# EAGLE board ai_firefly_panel (EAGLE 6.5.0)
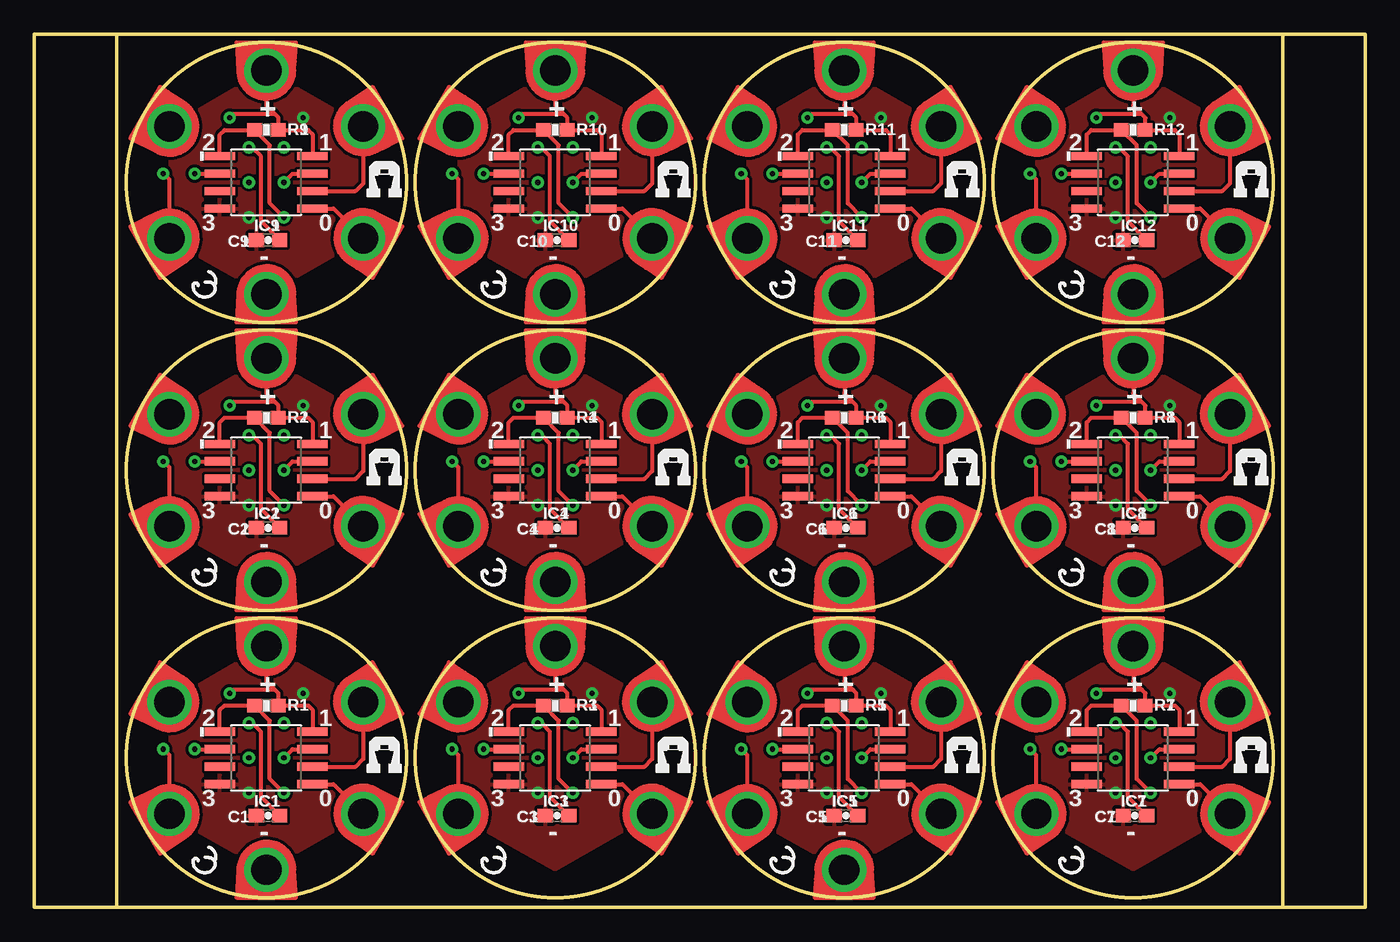
[diagram p0: board, top side]
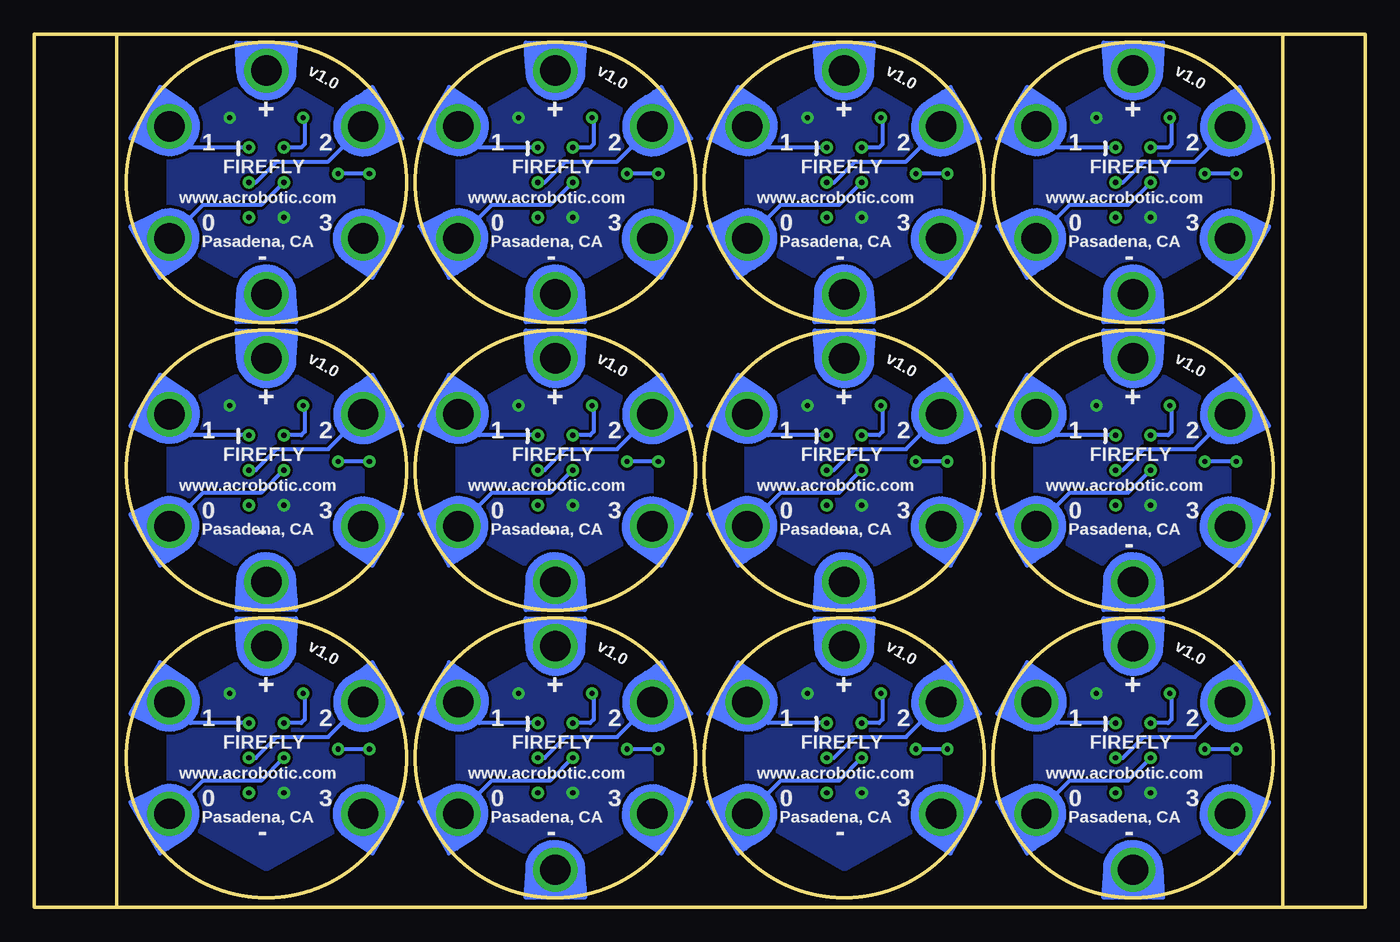
[diagram p1: board, bottom side, seen from below]

Size 96.72 x 63.46 mm. Coordinates in mm from the lower left corner, seen from the top.
Outline: 6,63.46 0,63.46 0,0 6,0
Outline: 6,63.46 90.72,63.46
Outline: 90.72,63.46 96.72,63.46 96.72,0 90.72,0
Outline: 90.72,63.46 90.72,0
Outline: 90.72,0 6,0
Outline: 6,63.46 6,0
Outline: circle at 16.86,10.86 radius 10.16
Outline: circle at 16.86,31.78 radius 10.16
Outline: circle at 37.86,10.86 radius 10.16
Outline: circle at 37.86,31.78 radius 10.16
Outline: circle at 58.86,10.86 radius 10.16
Outline: circle at 58.86,31.78 radius 10.16
Outline: circle at 79.86,10.86 radius 10.16
Outline: circle at 79.86,31.78 radius 10.16
Outline: circle at 16.86,52.7 radius 10.16
Outline: circle at 37.86,52.7 radius 10.16
Outline: circle at 58.86,52.7 radius 10.16
Outline: circle at 79.86,52.7 radius 10.16
Copper layers (1*16): Top 0.035mm / dielectric 1.5mm / Bottom 0.035mm
Design rules "ai_2layer_qfn": minimum track width 7mil, minimum drill 15mil, track to track 8mil, track to pad 8mil, pad to pad 8mil, via to via 8mil, smd to smd 8mil, copper to edge 8mil, drill to drill 8mil, minimum pad ring 1mil, minimum via ring 10mil, stop-mask expansion 4mil, vias tented up to drill 20mil, thermal gap 10mil
Net classes: 0 default: width 0.254 mm; 1 PWR: width 0.305 mm

## Footprints (pad centres in the part's own frame; a part is rotated, then mirrored left to right if it is on the bottom)
1X01-PETAL = drill 2.2: 1 0,0
CAP-0603 = smd 1.1 x 1: 1 -0.85,0; 2 0.85,0
S008-EIAJ = smd 0.61 x 2.21: 1 -1.905,-3.378; 2 -0.635,-3.378; 3 0.635,-3.378; 4 1.905,-3.378; 5 1.905,3.353; 6 0.635,3.353; 7 -0.635,3.353; 8 -1.905,3.353
RES-0603 = smd 1.1 x 1: 1 -0.85,0; 2 0.85,0

## Placement (x,y rotation side)
0  1X01-PETAL  [1X01-PETAL]  23.9,6.8 240 top
1  1X01-PETAL  [1X01-PETAL]  23.9,14.92 300 top
2  1X01-PETAL  [1X01-PETAL]  9.82,14.92 60 top
3  1X01-PETAL  [1X01-PETAL]  9.82,6.8 120 top
4  1X01-PETAL  [1X01-PETAL]  23.9,35.84 300 top
5  1X01-PETAL  [1X01-PETAL]  23.9,27.72 240 top
6  1X01-PETAL  [1X01-PETAL]  9.82,27.72 120 top
7  1X01-PETAL  [1X01-PETAL]  9.82,35.84 60 top
8  1X01-PETAL  [1X01-PETAL]  44.9,14.92 300 top
9  1X01-PETAL  [1X01-PETAL]  44.9,6.8 240 top
10  1X01-PETAL  [1X01-PETAL]  30.82,6.8 120 top
11  1X01-PETAL  [1X01-PETAL]  30.82,14.92 60 top
12  1X01-PETAL  [1X01-PETAL]  44.9,35.84 300 top
13  1X01-PETAL  [1X01-PETAL]  44.9,27.72 240 top
14  1X01-PETAL  [1X01-PETAL]  30.82,27.72 120 top
15  1X01-PETAL  [1X01-PETAL]  30.82,35.84 60 top
16  1X01-PETAL  [1X01-PETAL]  65.9,14.92 300 top
17  1X01-PETAL  [1X01-PETAL]  65.9,6.8 240 top
18  1X01-PETAL  [1X01-PETAL]  51.82,6.8 120 top
19  1X01-PETAL  [1X01-PETAL]  51.82,14.92 60 top
20  1X01-PETAL  [1X01-PETAL]  65.9,35.84 300 top
21  1X01-PETAL  [1X01-PETAL]  65.9,27.72 240 top
22  1X01-PETAL  [1X01-PETAL]  51.82,27.72 120 top
23  1X01-PETAL  [1X01-PETAL]  51.82,35.84 60 top
24  1X01-PETAL  [1X01-PETAL]  86.9,14.92 300 top
25  1X01-PETAL  [1X01-PETAL]  86.9,6.8 240 top
26  1X01-PETAL  [1X01-PETAL]  72.82,6.8 120 top
27  1X01-PETAL  [1X01-PETAL]  72.82,14.92 60 top
28  1X01-PETAL  [1X01-PETAL]  86.9,35.84 300 top
29  1X01-PETAL  [1X01-PETAL]  86.9,27.72 240 top
30  1X01-PETAL  [1X01-PETAL]  72.82,27.72 120 top
31  1X01-PETAL  [1X01-PETAL]  72.82,35.84 60 top
32  1X01-PETAL  [1X01-PETAL]  23.9,56.76 300 top
33  1X01-PETAL  [1X01-PETAL]  23.9,48.64 240 top
34  1X01-PETAL  [1X01-PETAL]  9.82,48.64 120 top
35  1X01-PETAL  [1X01-PETAL]  9.82,56.76 60 top
36  1X01-PETAL  [1X01-PETAL]  44.9,56.76 300 top
37  1X01-PETAL  [1X01-PETAL]  44.9,48.64 240 top
38  1X01-PETAL  [1X01-PETAL]  30.82,48.64 120 top
39  1X01-PETAL  [1X01-PETAL]  30.82,56.76 60 top
40  1X01-PETAL  [1X01-PETAL]  65.9,56.76 300 top
41  1X01-PETAL  [1X01-PETAL]  65.9,48.64 240 top
42  1X01-PETAL  [1X01-PETAL]  51.82,48.64 120 top
43  1X01-PETAL  [1X01-PETAL]  51.82,56.76 60 top
44  1X01-PETAL  [1X01-PETAL]  86.9,56.76 300 top
45  1X01-PETAL  [1X01-PETAL]  86.9,48.64 240 top
46  1X01-PETAL  [1X01-PETAL]  72.82,48.64 120 top
47  1X01-PETAL  [1X01-PETAL]  72.82,56.76 60 top
+  1X01-PETAL  [1X01-PETAL]  16.86,18.99 0 top
+1  1X01-PETAL  [1X01-PETAL]  16.86,39.91 0 top
+2  1X01-PETAL  [1X01-PETAL]  37.86,18.99 0 top
+3  1X01-PETAL  [1X01-PETAL]  37.86,39.91 0 top
+4  1X01-PETAL  [1X01-PETAL]  58.86,18.99 0 top
+5  1X01-PETAL  [1X01-PETAL]  58.86,39.91 0 top
+6  1X01-PETAL  [1X01-PETAL]  79.86,18.99 0 top
+7  1X01-PETAL  [1X01-PETAL]  79.86,39.91 0 top
+8  1X01-PETAL  [1X01-PETAL]  16.86,60.83 0 top
+9  1X01-PETAL  [1X01-PETAL]  37.86,60.83 0 top
+10  1X01-PETAL  [1X01-PETAL]  58.86,60.83 0 top
+11  1X01-PETAL  [1X01-PETAL]  79.86,60.83 0 top
-  1X01-PETAL  [1X01-PETAL]  16.86,2.73 180 top
-1  1X01-PETAL  [1X01-PETAL]  16.86,23.65 180 top
-2  1X01-PETAL  [1X01-PETAL]  37.86,23.65 180 top
-3  1X01-PETAL  [1X01-PETAL]  58.86,2.73 180 top
-4  1X01-PETAL  [1X01-PETAL]  58.86,23.65 180 top
-5  1X01-PETAL  [1X01-PETAL]  79.86,23.65 180 top
-6  1X01-PETAL  [1X01-PETAL]  16.86,44.57 180 top
-7  1X01-PETAL  [1X01-PETAL]  37.86,44.57 180 top
-8  1X01-PETAL  [1X01-PETAL]  58.86,44.57 180 top
-9  1X01-PETAL  [1X01-PETAL]  79.86,44.57 180 top
C1  0.1uF  [CAP-0603]  16.99,6.67 180 top
C2  0.1uF  [CAP-0603]  16.99,27.59 180 top
C3  0.1uF  [CAP-0603]  37.99,6.67 180 top
C4  0.1uF  [CAP-0603]  37.99,27.59 180 top
C5  0.1uF  [CAP-0603]  58.99,6.67 180 top
C6  0.1uF  [CAP-0603]  58.99,27.59 180 top
C7  0.1uF  [CAP-0603]  79.99,6.67 180 top
C8  0.1uF  [CAP-0603]  79.99,27.59 180 top
C9  0.1uF  [CAP-0603]  16.99,48.51 180 top
C10  0.1uF  [CAP-0603]  37.99,48.51 180 top
C11  0.1uF  [CAP-0603]  58.99,48.51 180 top
C12  0.1uF  [CAP-0603]  79.99,48.51 180 top
IC1  ATTINY45TINY85-SMT  [S008-EIAJ]  16.86,10.86 270 top
IC2  ATTINY45TINY85-SMT  [S008-EIAJ]  16.86,31.78 270 top
IC3  ATTINY45TINY85-SMT  [S008-EIAJ]  37.86,10.86 270 top
IC4  ATTINY45TINY85-SMT  [S008-EIAJ]  37.86,31.78 270 top
IC5  ATTINY45TINY85-SMT  [S008-EIAJ]  58.86,10.86 270 top
IC6  ATTINY45TINY85-SMT  [S008-EIAJ]  58.86,31.78 270 top
IC7  ATTINY45TINY85-SMT  [S008-EIAJ]  79.86,10.86 270 top
IC8  ATTINY45TINY85-SMT  [S008-EIAJ]  79.86,31.78 270 top
IC9  ATTINY45TINY85-SMT  [S008-EIAJ]  16.86,52.7 270 top
IC10  ATTINY45TINY85-SMT  [S008-EIAJ]  37.86,52.7 270 top
IC11  ATTINY45TINY85-SMT  [S008-EIAJ]  58.86,52.7 270 top
IC12  ATTINY45TINY85-SMT  [S008-EIAJ]  79.86,52.7 270 top
R1  10K  [RES-0603]  16.86,14.67 0 top
R2  10K  [RES-0603]  16.86,35.59 0 top
R3  10K  [RES-0603]  37.86,14.67 0 top
R4  10K  [RES-0603]  37.86,35.59 0 top
R5  10K  [RES-0603]  58.86,14.67 0 top
R6  10K  [RES-0603]  58.86,35.59 0 top
R7  10K  [RES-0603]  79.86,14.67 0 top
R8  10K  [RES-0603]  79.86,35.59 0 top
R9  10K  [RES-0603]  16.86,56.51 0 top
R10  10K  [RES-0603]  37.86,56.51 0 top
R11  10K  [RES-0603]  58.86,56.51 0 top
R12  10K  [RES-0603]  79.86,56.51 0 top
U$1  AI-LOGOXS  [AI-LOGO-XS]  24.1,30.64 0 top
U$2  AI-LOGOXS  [AI-LOGO-XS]  45.1,9.72 0 top
U$3  AI-LOGOXS  [AI-LOGO-XS]  45.1,30.64 0 top
U$4  AI-LOGOXS  [AI-LOGO-XS]  66.1,9.72 0 top
U$5  AI-LOGOXS  [AI-LOGO-XS]  66.1,30.64 0 top
U$6  AI-LOGOXS  [AI-LOGO-XS]  87.1,9.72 0 top
U$7  AI-LOGOXS  [AI-LOGO-XS]  87.1,30.64 0 top
U$8  AI-LOGOXS  [AI-LOGO-XS]  24.1,51.56 0 top
U$9  AI-LOGOXS  [AI-LOGO-XS]  24.1,9.72 0 top
U$10  AI-LOGOXS  [AI-LOGO-XS]  45.1,51.56 0 top
U$11  AI-LOGOXS  [AI-LOGO-XS]  66.1,51.56 0 top
U$12  AI-LOGOXS  [AI-LOGO-XS]  87.1,51.56 0 top

## Library data of the parts
0 1-47 + +1-+11 - -1--9 = Ai_Connectors
C1-C12 R1-R12 = Ai_Passives
IC1-IC12 = Ai_IC
U$1-U$12 = Ai_Miscellany

## Nets
0: 0.1 IC1.5
1: 1.1 IC1.6
2: 2.1 IC1.7
3: 3.1 IC1.2
4: 6.1 IC2.2
5: 7.1 IC2.7
6: 4.1 IC2.6
7: 5.1 IC2.5
8: 10.1 IC3.2
9: 11.1 IC3.7
10: 8.1 IC3.6
11: 9.1 IC3.5
12: 14.1 IC4.2
13: 15.1 IC4.7
14: 12.1 IC4.6
15: 13.1 IC4.5
16: 18.1 IC5.2
17: 19.1 IC5.7
18: 16.1 IC5.6
19: 17.1 IC5.5
20: 22.1 IC6.2
21: 23.1 IC6.7
22: 20.1 IC6.6
23: 21.1 IC6.5
24: 26.1 IC7.2
25: 27.1 IC7.7
26: 24.1 IC7.6
27: 25.1 IC7.5
28: 30.1 IC8.2
29: 31.1 IC8.7
30: 28.1 IC8.6
31: 29.1 IC8.5
32: 34.1 IC9.2
33: 35.1 IC9.7
34: 32.1 IC9.6
35: 33.1 IC9.5
36: 38.1 IC10.2
37: 39.1 IC10.7
38: 36.1 IC10.6
39: 37.1 IC10.5
40: 42.1 IC11.2
41: 43.1 IC11.7
42: 40.1 IC11.6
43: 41.1 IC11.5
44: 46.1 IC12.2
45: 47.1 IC12.7
46: 44.1 IC12.6
47: 45.1 IC12.5
GND: -.1 C1.2 IC1.4
GND1: -1.1 C2.2 IC2.4
GND2: C3.2 IC3.4
GND3: -2.1 C4.2 IC4.4
GND4: -3.1 C5.2 IC5.4
GND5: -4.1 C6.2 IC6.4
GND6: C7.2 IC7.4
GND7: -5.1 C8.2 IC8.4
GND8: -6.1 C9.2 IC9.4
GND9: -7.1 C10.2 IC10.4
GND10: -8.1 C11.2 IC11.4
GND11: -9.1 C12.2 IC12.4
RES: IC1.1 R1.1
RES1: IC2.1 R2.1
RES2: IC3.1 R3.1
RES3: IC4.1 R4.1
RES4: IC5.1 R5.1
RES5: IC6.1 R6.1
RES6: IC7.1 R7.1
RES7: IC8.1 R8.1
RES8: IC9.1 R9.1
RES9: IC10.1 R10.1
RES10: IC11.1 R11.1
RES11: IC12.1 R12.1
VCC: +.1 C1.1 IC1.8 R1.2
VCC1: +1.1 C2.1 IC2.8 R2.2
VCC2: +2.1 C3.1 IC3.8 R3.2
VCC3: +3.1 C4.1 IC4.8 R4.2
VCC4: +4.1 C5.1 IC5.8 R5.2
VCC5: +5.1 C6.1 IC6.8 R6.2
VCC6: +6.1 C7.1 IC7.8 R7.2
VCC7: +7.1 C8.1 IC8.8 R8.2
VCC8: +8.1 C9.1 IC9.8 R9.2
VCC9: +9.1 C10.1 IC10.8 R10.2
VCC10: +10.1 C11.1 IC11.8 R11.2
VCC11: +11.1 C12.1 IC12.8 R12.2

## Tracks (layer width: path | path; a pad name or v marks a point on that pad's centre or on a via)
0  (via drill 0.38)
  Top 0.305: IC1.5 21.74,8.96 0.1
  Bottom 0.305: v15.59,10.86 17.24,9.21 21.49,9.21 0.1
1  (via drill 0.38)
  Top 0.305: IC1.6 23.34,10.22 23.9,10.79 1.1
  Bottom 0.305: v18.13,13.4 22.38,13.4 1.1
2  (via drill 0.38)
  Top 0.305: v18.13,10.86 18.77,11.49 IC1.7
  Bottom 0.305: 2.1 12.36,12.38 16.1,12.38 17.62,10.86 v18.13,10.86
3  (via drill 0.38)
  Top 0.305: 3.1 9.82,11.06 v9.37,11.49 | v11.65,11.49 IC1.2
  Bottom 0.305: v9.37,11.49 v11.65,11.49
4  (via drill 0.38)
  Top 0.305: 6.1 9.82,31.98 v9.37,32.41 | v11.65,32.41 IC2.2
  Bottom 0.305: v9.37,32.41 v11.65,32.41
5  (via drill 0.38)
  Top 0.305: v18.13,31.78 18.77,32.41 IC2.7
  Bottom 0.305: 7.1 12.36,33.3 16.1,33.3 17.62,31.78 v18.13,31.78
6  (via drill 0.38)
  Top 0.305: IC2.6 23.34,31.14 23.9,31.71 4.1
  Bottom 0.305: v18.13,34.32 22.38,34.32 4.1
7  (via drill 0.38)
  Top 0.305: IC2.5 21.74,29.88 5.1
  Bottom 0.305: v15.59,31.78 17.24,30.13 21.49,30.13 5.1
8  (via drill 0.38)
  Top 0.305: 10.1 30.82,11.06 v30.37,11.49 | v32.65,11.49 IC3.2
  Bottom 0.305: v30.37,11.49 v32.65,11.49
9  (via drill 0.38)
  Top 0.305: v39.13,10.86 39.77,11.49 IC3.7
  Bottom 0.305: 11.1 33.36,12.38 37.1,12.38 38.62,10.86 v39.13,10.86
10  (via drill 0.38)
  Top 0.305: IC3.6 44.34,10.22 44.9,10.79 8.1
  Bottom 0.305: v39.13,13.4 43.38,13.4 8.1
11  (via drill 0.38)
  Top 0.305: IC3.5 42.74,8.96 9.1
  Bottom 0.305: v36.59,10.86 38.24,9.21 42.49,9.21 9.1
12  (via drill 0.38)
  Top 0.305: 14.1 30.82,31.98 v30.37,32.41 | v32.65,32.41 IC4.2
  Bottom 0.305: v30.37,32.41 v32.65,32.41
13  (via drill 0.38)
  Top 0.305: v39.13,31.78 39.77,32.41 IC4.7
  Bottom 0.305: 15.1 33.36,33.3 37.1,33.3 38.62,31.78 v39.13,31.78
14  (via drill 0.38)
  Top 0.305: IC4.6 44.34,31.14 44.9,31.71 12.1
  Bottom 0.305: v39.13,34.32 43.38,34.32 12.1
15  (via drill 0.38)
  Top 0.305: IC4.5 42.74,29.88 13.1
  Bottom 0.305: v36.59,31.78 38.24,30.13 42.49,30.13 13.1
16  (via drill 0.38)
  Top 0.305: 18.1 51.82,11.06 v51.37,11.49 | v53.65,11.49 IC5.2
  Bottom 0.305: v51.37,11.49 v53.65,11.49
17  (via drill 0.38)
  Top 0.305: v60.13,10.86 60.77,11.49 IC5.7
  Bottom 0.305: 19.1 54.36,12.38 58.1,12.38 59.62,10.86 v60.13,10.86
18  (via drill 0.38)
  Top 0.305: IC5.6 65.34,10.22 65.9,10.79 16.1
  Bottom 0.305: v60.13,13.4 64.38,13.4 16.1
19  (via drill 0.38)
  Top 0.305: IC5.5 63.74,8.96 17.1
  Bottom 0.305: v57.59,10.86 59.24,9.21 63.49,9.21 17.1
20  (via drill 0.38)
  Top 0.305: 22.1 51.82,31.98 v51.37,32.41 | v53.65,32.41 IC6.2
  Bottom 0.305: v51.37,32.41 v53.65,32.41
21  (via drill 0.38)
  Top 0.305: v60.13,31.78 60.77,32.41 IC6.7
  Bottom 0.305: 23.1 54.36,33.3 58.1,33.3 59.62,31.78 v60.13,31.78
22  (via drill 0.38)
  Top 0.305: IC6.6 65.34,31.14 65.9,31.71 20.1
  Bottom 0.305: v60.13,34.32 64.38,34.32 20.1
23  (via drill 0.38)
  Top 0.305: IC6.5 63.74,29.88 21.1
  Bottom 0.305: v57.59,31.78 59.24,30.13 63.49,30.13 21.1
24  (via drill 0.38)
  Top 0.305: 26.1 72.82,11.06 v72.37,11.49 | v74.65,11.49 IC7.2
  Bottom 0.305: v72.37,11.49 v74.65,11.49
25  (via drill 0.38)
  Top 0.305: v81.13,10.86 81.77,11.49 IC7.7
  Bottom 0.305: 27.1 75.36,12.38 79.1,12.38 80.62,10.86 v81.13,10.86
26  (via drill 0.38)
  Top 0.305: IC7.6 86.34,10.22 86.9,10.79 24.1
  Bottom 0.305: v81.13,13.4 85.38,13.4 24.1
27  (via drill 0.38)
  Top 0.305: IC7.5 84.74,8.96 25.1
  Bottom 0.305: v78.59,10.86 80.24,9.21 84.49,9.21 25.1
28  (via drill 0.38)
  Top 0.305: 30.1 72.82,31.98 v72.37,32.41 | v74.65,32.41 IC8.2
  Bottom 0.305: v72.37,32.41 v74.65,32.41
29  (via drill 0.38)
  Top 0.305: v81.13,31.78 81.77,32.41 IC8.7
  Bottom 0.305: 31.1 75.36,33.3 79.1,33.3 80.62,31.78 v81.13,31.78
30  (via drill 0.38)
  Top 0.305: IC8.6 86.34,31.14 86.9,31.71 28.1
  Bottom 0.305: v81.13,34.32 85.38,34.32 28.1
31  (via drill 0.38)
  Top 0.305: IC8.5 84.74,29.88 29.1
  Bottom 0.305: v78.59,31.78 80.24,30.13 84.49,30.13 29.1
32  (via drill 0.38)
  Top 0.305: 34.1 9.82,52.9 v9.37,53.34 | v11.65,53.34 IC9.2
  Bottom 0.305: v9.37,53.34 v11.65,53.34
33  (via drill 0.38)
  Top 0.305: v18.13,52.7 18.77,53.34 IC9.7
  Bottom 0.305: 35.1 12.36,54.22 16.1,54.22 17.62,52.7 v18.13,52.7
34  (via drill 0.38)
  Top 0.305: IC9.6 23.34,52.06 23.9,52.63 32.1
  Bottom 0.305: v18.13,55.24 22.38,55.24 32.1
35  (via drill 0.38)
  Top 0.305: IC9.5 21.74,50.8 33.1
  Bottom 0.305: v15.59,52.7 17.24,51.05 21.49,51.05 33.1
36  (via drill 0.38)
  Top 0.305: 38.1 30.82,52.9 v30.37,53.34 | v32.65,53.34 IC10.2
  Bottom 0.305: v30.37,53.34 v32.65,53.34
37  (via drill 0.38)
  Top 0.305: v39.13,52.7 39.77,53.34 IC10.7
  Bottom 0.305: 39.1 33.36,54.22 37.1,54.22 38.62,52.7 v39.13,52.7
38  (via drill 0.38)
  Top 0.305: IC10.6 44.34,52.06 44.9,52.63 36.1
  Bottom 0.305: v39.13,55.24 43.38,55.24 36.1
39  (via drill 0.38)
  Top 0.305: IC10.5 42.74,50.8 37.1
  Bottom 0.305: v36.59,52.7 38.24,51.05 42.49,51.05 37.1
40  (via drill 0.38)
  Top 0.305: 42.1 51.82,52.9 v51.37,53.34 | v53.65,53.34 IC11.2
  Bottom 0.305: v51.37,53.34 v53.65,53.34
41  (via drill 0.38)
  Top 0.305: v60.13,52.7 60.77,53.34 IC11.7
  Bottom 0.305: 43.1 54.36,54.22 58.1,54.22 59.62,52.7 v60.13,52.7
42  (via drill 0.38)
  Top 0.305: IC11.6 65.34,52.06 65.9,52.63 40.1
  Bottom 0.305: v60.13,55.24 64.38,55.24 40.1
43  (via drill 0.38)
  Top 0.305: IC11.5 63.74,50.8 41.1
  Bottom 0.305: v57.59,52.7 59.24,51.05 63.49,51.05 41.1
44  (via drill 0.38)
  Top 0.305: 46.1 72.82,52.9 v72.37,53.34 | v74.65,53.34 IC12.2
  Bottom 0.305: v72.37,53.34 v74.65,53.34
45  (via drill 0.38)
  Top 0.305: v81.13,52.7 81.77,53.34 IC12.7
  Bottom 0.305: 47.1 75.36,54.22 79.1,54.22 80.62,52.7 v81.13,52.7
46  (via drill 0.38)
  Top 0.305: IC12.6 86.34,52.06 86.9,52.63 44.1
  Bottom 0.305: v81.13,55.24 85.38,55.24 44.1
47  (via drill 0.38)
  Top 0.305: IC12.5 84.74,50.8 45.1
  Bottom 0.305: v78.59,52.7 80.24,51.05 84.49,51.05 45.1
GND  (via drill 0.38)
  other vias: 15.59,8.32 19.53,15.56
  pour Top: 9.88,14.92 9.88,6.67 16.86,2.73 23.97,6.8 23.97,14.92 16.86,18.99
  pour Bottom: 9.88,14.92 9.88,6.67 16.86,2.73 23.97,6.8 23.97,14.92 16.86,18.99
GND1  (via drill 0.38)
  other vias: 15.59,29.24 19.53,36.48
  pour Top: 9.88,35.84 9.88,27.59 16.86,23.65 23.97,27.72 23.97,35.84 16.86,39.91
  pour Bottom: 9.88,35.84 9.88,27.59 16.86,23.65 23.97,27.72 23.97,35.84 16.86,39.91
GND2  (via drill 0.38)
  other vias: 36.59,8.32 40.53,15.56
  pour Top: 30.88,14.92 30.88,6.67 37.86,2.73 44.97,6.8 44.97,14.92 37.86,18.99
  pour Bottom: 30.88,14.92 30.88,6.67 37.86,2.73 44.97,6.8 44.97,14.92 37.86,18.99
GND3  (via drill 0.38)
  other vias: 36.59,29.24 40.53,36.48
  pour Top: 30.88,35.84 30.88,27.59 37.86,23.65 44.97,27.72 44.97,35.84 37.86,39.91
  pour Bottom: 30.88,35.84 30.88,27.59 37.86,23.65 44.97,27.72 44.97,35.84 37.86,39.91
GND4  (via drill 0.38)
  other vias: 57.59,8.32 61.53,15.56
  pour Top: 51.88,14.92 51.88,6.67 58.86,2.73 65.97,6.8 65.97,14.92 58.86,18.99
  pour Bottom: 51.88,14.92 51.88,6.67 58.86,2.73 65.97,6.8 65.97,14.92 58.86,18.99
GND5  (via drill 0.38)
  other vias: 57.59,29.24 61.53,36.48
  pour Top: 51.88,35.84 51.88,27.59 58.86,23.65 65.97,27.72 65.97,35.84 58.86,39.91
  pour Bottom: 51.88,35.84 51.88,27.59 58.86,23.65 65.97,27.72 65.97,35.84 58.86,39.91
GND6  (via drill 0.38)
  other vias: 78.59,8.32 82.53,15.56
  pour Top: 72.88,14.92 72.88,6.67 79.86,2.73 86.97,6.8 86.97,14.92 79.86,18.99
  pour Bottom: 72.88,14.92 72.88,6.67 79.86,2.73 86.97,6.8 86.97,14.92 79.86,18.99
GND7  (via drill 0.38)
  other vias: 78.59,29.24 82.53,36.48
  pour Top: 72.88,35.84 72.88,27.59 79.86,23.65 86.97,27.72 86.97,35.84 79.86,39.91
  pour Bottom: 72.88,35.84 72.88,27.59 79.86,23.65 86.97,27.72 86.97,35.84 79.86,39.91
GND8  (via drill 0.38)
  other vias: 15.59,50.16 19.53,57.4
  pour Top: 9.88,56.76 9.88,48.51 16.86,44.57 23.97,48.64 23.97,56.76 16.86,60.83
  pour Bottom: 9.88,56.76 9.88,48.51 16.86,44.57 23.97,48.64 23.97,56.76 16.86,60.83
GND9  (via drill 0.38)
  other vias: 36.59,50.16 40.53,57.4
  pour Top: 30.88,56.76 30.88,48.51 37.86,44.57 44.97,48.64 44.97,56.76 37.86,60.83
  pour Bottom: 30.88,56.76 30.88,48.51 37.86,44.57 44.97,48.64 44.97,56.76 37.86,60.83
GND10  (via drill 0.38)
  other vias: 57.59,50.16 61.53,57.4
  pour Top: 51.88,56.76 51.88,48.51 58.86,44.57 65.97,48.64 65.97,56.76 58.86,60.83
  pour Bottom: 51.88,56.76 51.88,48.51 58.86,44.57 65.97,48.64 65.97,56.76 58.86,60.83
GND11  (via drill 0.38)
  other vias: 78.59,50.16 82.53,57.4
  pour Top: 72.88,56.76 72.88,48.51 79.86,44.57 86.97,48.64 86.97,56.76 79.86,60.83
  pour Bottom: 72.88,56.76 72.88,48.51 79.86,44.57 86.97,48.64 86.97,56.76 79.86,60.83
RES  (via drill 0.38)
  Top 0.305: IC1.1 13.48,14.34 13.81,14.67 R1.1 17.11,13.57 17.11,9.34 v18.13,8.32
RES1  (via drill 0.38)
  Top 0.305: IC2.1 13.48,35.26 13.81,35.59 R2.1 17.11,34.49 17.11,30.26 v18.13,29.24
RES2  (via drill 0.38)
  Top 0.305: IC3.1 34.48,14.34 34.81,14.67 R3.1 38.11,13.57 38.11,9.34 v39.13,8.32
RES3  (via drill 0.38)
  Top 0.305: IC4.1 34.48,35.26 34.81,35.59 R4.1 38.11,34.49 38.11,30.26 v39.13,29.24
RES4  (via drill 0.38)
  Top 0.305: IC5.1 55.48,14.34 55.81,14.67 R5.1 59.11,13.57 59.11,9.34 v60.13,8.32
RES5  (via drill 0.38)
  Top 0.305: IC6.1 55.48,35.26 55.81,35.59 R6.1 59.11,34.49 59.11,30.26 v60.13,29.24
RES6  (via drill 0.38)
  Top 0.305: IC7.1 76.48,14.34 76.81,14.67 R7.1 80.11,13.57 80.11,9.34 v81.13,8.32
RES7  (via drill 0.38)
  Top 0.305: IC8.1 76.48,35.26 76.81,35.59 R8.1 80.11,34.49 80.11,30.26 v81.13,29.24
RES8  (via drill 0.38)
  Top 0.305: IC9.1 13.48,56.18 13.81,56.51 R9.1 17.11,55.41 17.11,51.18 v18.13,50.16
RES9  (via drill 0.38)
  Top 0.305: IC10.1 34.48,56.18 34.81,56.51 R10.1 38.11,55.41 38.11,51.18 v39.13,50.16
RES10  (via drill 0.38)
  Top 0.305: IC11.1 55.48,56.18 55.81,56.51 R11.1 59.11,55.41 59.11,51.18 v60.13,50.16
RES11  (via drill 0.38)
  Top 0.305: IC12.1 76.48,56.18 76.81,56.51 R12.1 80.11,55.41 80.11,51.18 v81.13,50.16
VCC  (via drill 0.38)
  Top 0.305: C1.1 16.48,8.03 16.48,12.77 15.84,13.4 v15.59,13.4 | IC1.8 20.21,14.37 19.91,14.67 R1.2 17.75,14.71 17.75,15.56 17.5,15.81 | 17.5,15.81 14.45,15.81 v14.19,15.56 | +.1 16.86,16.45 17.5,15.81
  Bottom 0.305: v15.59,13.4 14.32,13.4 14.07,13.65 14.07,15.56 v14.19,15.56
VCC1  (via drill 0.38)
  Top 0.305: C2.1 16.48,28.95 16.48,33.69 15.84,34.32 v15.59,34.32 | IC2.8 20.21,35.28 19.91,35.59 R2.2 17.75,35.63 17.75,36.48 17.5,36.73 | 17.5,36.73 14.45,36.73 v14.19,36.48 | +1.1 16.86,37.37 17.5,36.73
  Bottom 0.305: v15.59,34.32 14.32,34.32 14.07,34.57 14.07,36.48 v14.19,36.48
VCC2  (via drill 0.38)
  Top 0.305: C3.1 37.48,8.03 37.48,12.77 36.84,13.4 v36.59,13.4 | IC3.8 41.21,14.37 40.91,14.67 R3.2 38.75,14.71 38.75,15.56 38.49,15.81 | 38.49,15.81 35.45,15.81 v35.19,15.56 | +2.1 37.86,16.45 38.49,15.81
  Bottom 0.305: v36.59,13.4 35.32,13.4 35.07,13.65 35.07,15.56 v35.19,15.56
VCC3  (via drill 0.38)
  Top 0.305: C4.1 37.48,28.95 37.48,33.69 36.84,34.32 v36.59,34.32 | IC4.8 41.21,35.28 40.91,35.59 R4.2 38.75,35.63 38.75,36.48 38.49,36.73 | 38.49,36.73 35.45,36.73 v35.19,36.48 | +3.1 37.86,37.37 38.49,36.73
  Bottom 0.305: v36.59,34.32 35.32,34.32 35.07,34.57 35.07,36.48 v35.19,36.48
VCC4  (via drill 0.38)
  Top 0.305: C5.1 58.48,8.03 58.48,12.77 57.84,13.4 v57.59,13.4 | IC5.8 62.21,14.37 61.91,14.67 R5.2 59.75,14.71 59.75,15.56 59.49,15.81 | 59.49,15.81 56.45,15.81 v56.19,15.56 | +4.1 58.86,16.45 59.49,15.81
  Bottom 0.305: v57.59,13.4 56.32,13.4 56.07,13.65 56.07,15.56 v56.19,15.56
VCC5  (via drill 0.38)
  Top 0.305: C6.1 58.48,28.95 58.48,33.69 57.84,34.32 v57.59,34.32 | IC6.8 62.21,35.28 61.91,35.59 R6.2 59.75,35.63 59.75,36.48 59.49,36.73 | 59.49,36.73 56.45,36.73 v56.19,36.48 | +5.1 58.86,37.37 59.49,36.73
  Bottom 0.305: v57.59,34.32 56.32,34.32 56.07,34.57 56.07,36.48 v56.19,36.48
VCC6  (via drill 0.38)
  Top 0.305: C7.1 79.48,8.03 79.48,12.77 78.84,13.4 v78.59,13.4 | IC7.8 83.21,14.37 82.91,14.67 R7.2 80.75,14.71 80.75,15.56 80.5,15.81 | 80.5,15.81 77.45,15.81 v77.19,15.56 | +6.1 79.86,16.45 80.5,15.81
  Bottom 0.305: v78.59,13.4 77.32,13.4 77.07,13.65 77.07,15.56 v77.19,15.56
VCC7  (via drill 0.38)
  Top 0.305: C8.1 79.48,28.95 79.48,33.69 78.84,34.32 v78.59,34.32 | IC8.8 83.21,35.28 82.91,35.59 R8.2 80.75,35.63 80.75,36.48 80.5,36.73 | 80.5,36.73 77.45,36.73 v77.19,36.48 | +7.1 79.86,37.37 80.5,36.73
  Bottom 0.305: v78.59,34.32 77.32,34.32 77.07,34.57 77.07,36.48 v77.19,36.48
VCC8  (via drill 0.38)
  Top 0.305: C9.1 16.48,49.87 16.48,54.6 15.84,55.24 v15.59,55.24 | IC9.8 20.21,56.2 19.91,56.51 R9.2 17.75,56.55 17.75,57.4 17.5,57.65 | 17.5,57.65 14.45,57.65 v14.19,57.4 | +8.1 16.86,58.29 17.5,57.65
  Bottom 0.305: v15.59,55.24 14.32,55.24 14.07,55.49 14.07,57.4 v14.19,57.4
VCC9  (via drill 0.38)
  Top 0.305: C10.1 37.48,49.87 37.48,54.6 36.84,55.24 v36.59,55.24 | IC10.8 41.21,56.2 40.91,56.51 R10.2 38.75,56.55 38.75,57.4 38.49,57.65 | 38.49,57.65 35.45,57.65 v35.19,57.4 | +9.1 37.86,58.29 38.49,57.65
  Bottom 0.305: v36.59,55.24 35.32,55.24 35.07,55.49 35.07,57.4 v35.19,57.4
VCC10  (via drill 0.38)
  Top 0.305: C11.1 58.48,49.87 58.48,54.6 57.84,55.24 v57.59,55.24 | IC11.8 62.21,56.2 61.91,56.51 R11.2 59.75,56.55 59.75,57.4 59.49,57.65 | 59.49,57.65 56.45,57.65 v56.19,57.4 | +10.1 58.86,58.29 59.49,57.65
  Bottom 0.305: v57.59,55.24 56.32,55.24 56.07,55.49 56.07,57.4 v56.19,57.4
VCC11  (via drill 0.38)
  Top 0.305: C12.1 79.48,49.87 79.48,54.6 78.84,55.24 v78.59,55.24 | IC12.8 83.21,56.2 82.91,56.51 R12.2 80.75,56.55 80.75,57.4 80.5,57.65 | 80.5,57.65 77.45,57.65 v77.19,57.4 | +11.1 79.86,58.29 80.5,57.65
  Bottom 0.305: v78.59,55.24 77.32,55.24 77.07,55.49 77.07,57.4 v77.19,57.4

## Text on the board
tPlace: + | + | + | + | 2 | 1 | 2 | 1 | 2 | 1 | 2 | 1 | 3 | 0 | 3 | 0 | 3 | 0 | 3 | 0 | - | - | - | - | + | + | + | + | 2 | 1 | 2 | 1 | 2 | 1 | 2 | 1 | 3 | 0 | 3 | 0 | 3 | 0 | 3 | 0 | - | - | - | - | + | + | + | + | 2 | 1 | 2 | 1 | 2 | 1 | 2 | 1 | 3 | 0 | 3 | 0 | 3 | 0 | 3 | 0 | - | - | - | -
bPlace: v1.0 | v1.0 | v1.0 | v1.0 | + | + | + | + | 2 | 1 | 2 | 1 | 2 | 1 | 2 | 1 | FIREFLY | FIREFLY | FIREFLY | FIREFLY | www.acrobotic.com | www.acrobotic.com | www.acrobotic.com | www.acrobotic.com | 3 | 0 | 3 | 0 | 3 | 0 | 3 | 0 | Pasadena, CA | Pasadena, CA | Pasadena, CA | Pasadena, CA | - | - | - | - | v1.0 | v1.0 | v1.0 | v1.0 | + | + | + | + | 2 | 1 | 2 | 1 | 2 | 1 | 2 | 1 | FIREFLY | FIREFLY | FIREFLY | FIREFLY | www.acrobotic.com | www.acrobotic.com | www.acrobotic.com | www.acrobotic.com | 3 | 0 | 3 | 0 | 3 | 0 | 3 | 0 | Pasadena, CA | - | Pasadena, CA | - | Pasadena, CA | - | Pasadena, CA | - | v1.0 | v1.0 | v1.0 | v1.0 | + | + | + | + | 2 | 1 | 2 | 1 | 2 | 1 | 2 | 1 | FIREFLY | FIREFLY | FIREFLY | FIREFLY | www.acrobotic.com | www.acrobotic.com | www.acrobotic.com | www.acrobotic.com | 3 | 0 | 3 | 0 | 3 | 0 | 3 | 0 | Pasadena, CA | Pasadena, CA | Pasadena, CA | Pasadena, CA | - | - | - | -
_tNames: R1 | R1 | R1 | R1 | IC1 | IC1 | IC1 | IC1 | C1 | C1 | C1 | C1 | R1 | R1 | R1 | R1 | IC1 | IC1 | IC1 | IC1 | C1 | C1 | C1 | C1 | R1 | R1 | R1 | R1 | IC1 | IC1 | IC1 | IC1 | C1 | C1 | C1 | C1